# Altium PCB MB_PCB.PcbDoc
Units mm, origin at the board's own origin, x right, y up, seen from the top; angles counter-clockwise.
Board outline 70 x 47.5 mm, 2 copper layers (Top Layer, Bottom Layer); 28 components, 20 nets, 111 pads, 0 vias.
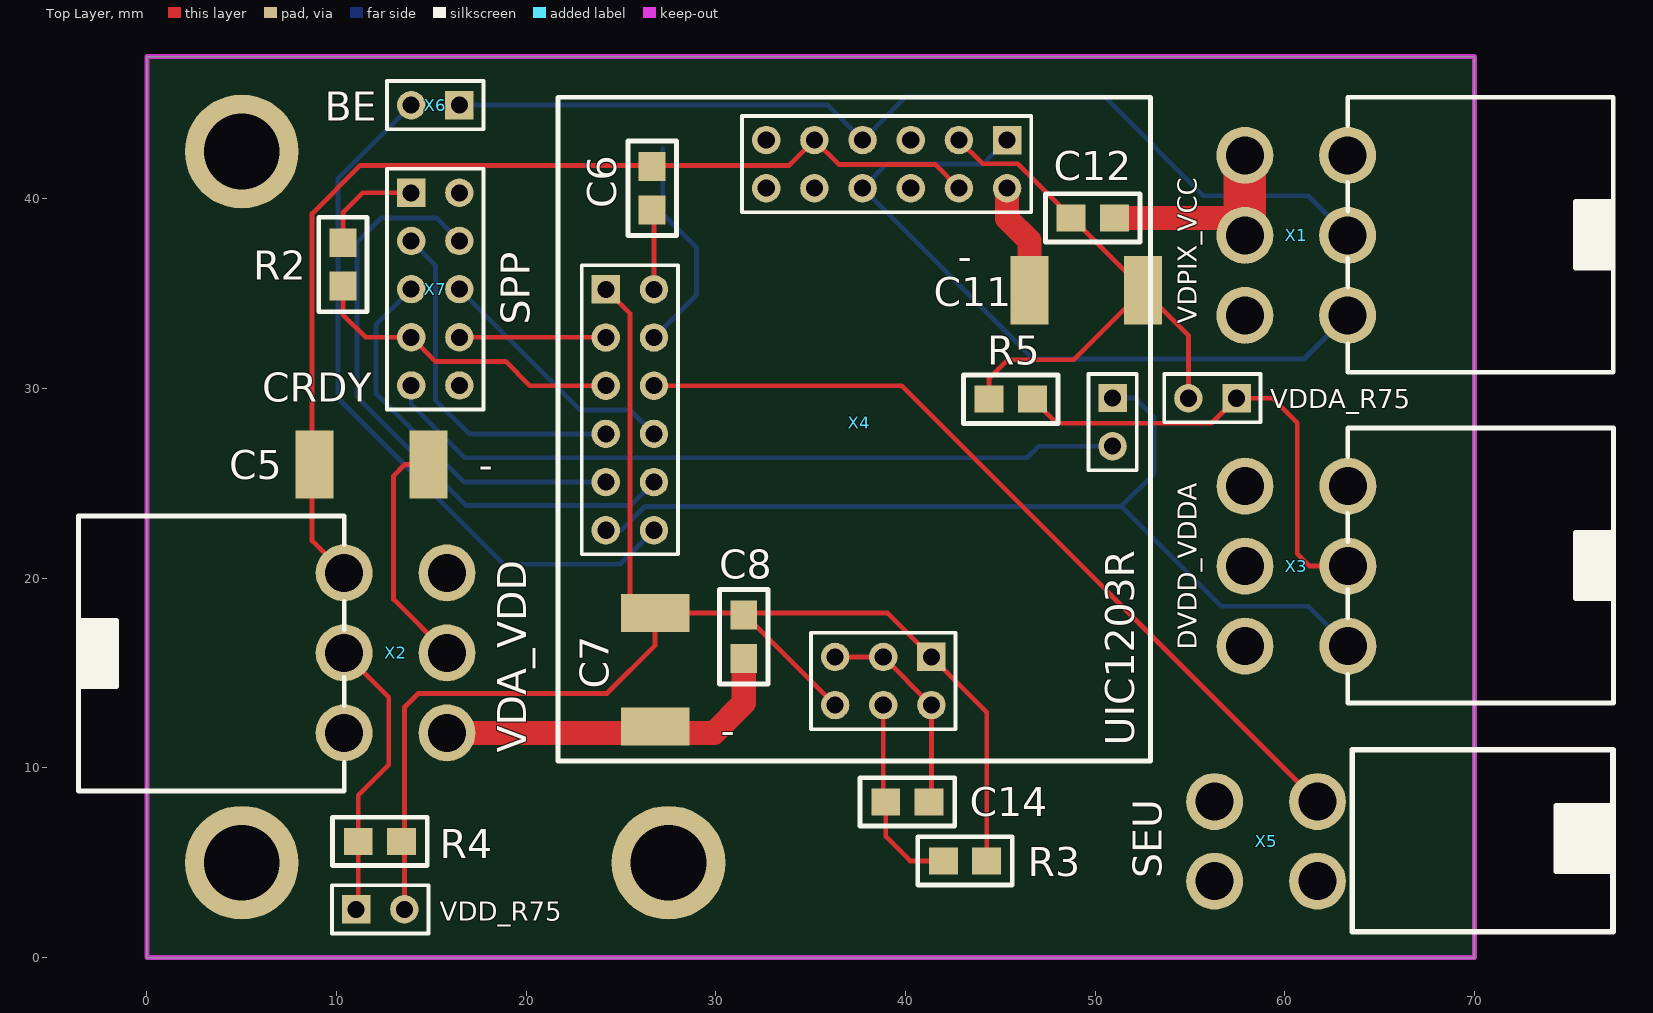
[diagram p0: Top Layer view]
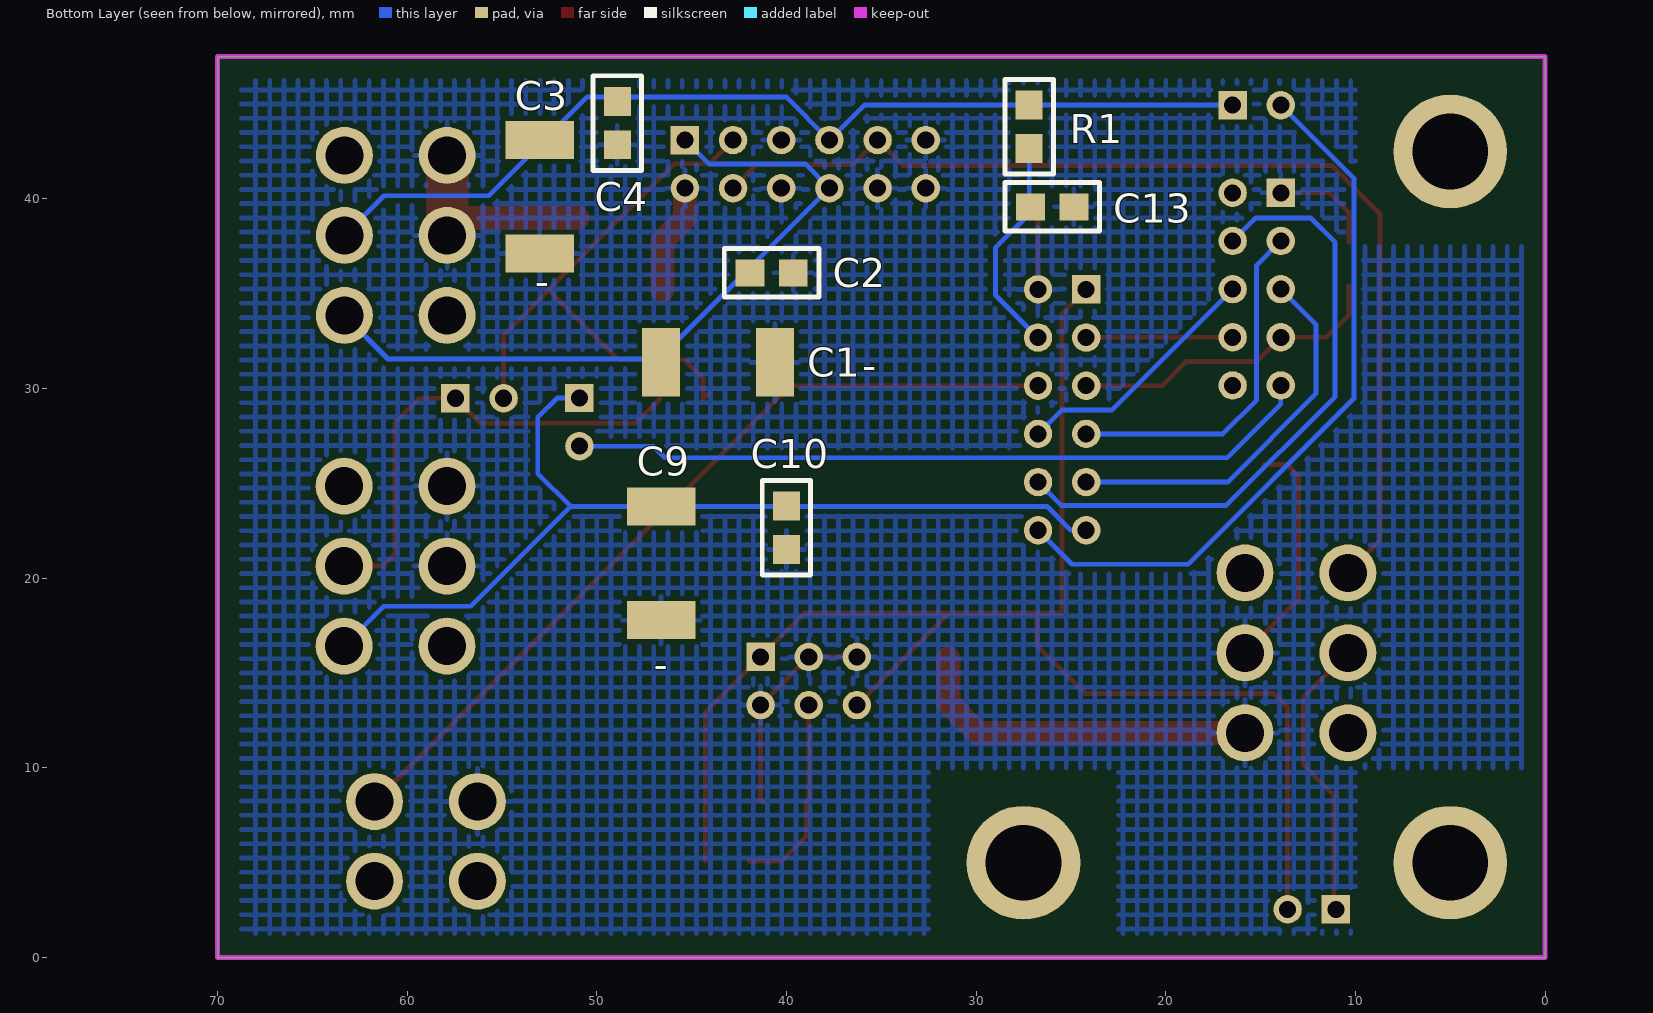
[diagram p1: Bottom Layer view, seen from below]

## Layer stack, top to bottom
Top Solder: solder mask 0.0102, Solder Resist, Dk 3.5
Top Layer: signal copper 0.0356
Dielectric 1: dielectric 0.32, FR-4, Dk 4.8
Bottom Layer: signal copper 0.0356
Bottom Solder: solder mask 0.0102, Solder Resist, Dk 3.5

## Board outline
0,0 70,0 70,47.5 0,47.5

## Design rules (kind name [scope] priority, off if disabled: settings)
Clearance [All] p1: gap=0.254
PolygonConnect [All] p1: connectstyle=Relief reliefconductorwidth=0.254 reliefentries=4 polygonreliefangle="90 Angle" airgapwidth=0.254
RoutingVias [All] p1: holewidth=0.711 width=1.27 viastyle="Through Hole" minholewidth=0.711 minwidth=1.27 maxholewidth=0.711 maxwidth=1.27
SolderMaskExpansion [All] p1: expansion=0.102
Width [All] p1: maxlimit=2.254 minlimit=0.254 preferedwidth=0.254
29 further rules are at their usual default settings.

## Components (designator, comment, footprint, x,y, rotation, side; value= is the part's Value field where it differs from the comment)
C1 "10,0" Cap_BIG 47.701,33.284 r270 bottom
C2 "0,1" CAP_SMALL 38.278,37.374 r0 bottom
C3 "10,0" Cap_BIG 51.105,44.206 r0 bottom
C4 "0,1" CAP_SMALL 47.65,41.489 r90 bottom
C5 "10,0" Cap_BIG 7.747,27.9 r270 top
C6 "0,1" CAP_SMALL 27.915,38.06 r90 top
C7 "10,0" Cap_BIG 28.702,19.264 r180 top
C8 "0,1" CAP_SMALL 32.741,14.412 r90 top
C9 "10,0" Cap_BIG 44.704,24.877 r0 bottom
C10 "0,1" CAP_SMALL 38.735,20.153 r90 bottom
C11 "10,0" Cap_BIG 53.619,33.284 r90 top
C12 "0,1" CAP_SMALL 52.375,40.269 r180 top
C13 "0,1" CAP_SMALL 28.499,38.314 r180 bottom
C14 "0,1" CAP_SMALL 37.592,6.934 r0 top
R1 "3 кОм" RES 25.959,46.289 r0 bottom
R2 "20 кОм" RES 11.582,39.025 r180 top
R3 "1 кОм" RES 45.618,3.852 r90 top
R4 "75" RES 9.804,7.366 r270 top
R5 "75" RES 48.031,28.194 r90 top
VDD_R75 "Header 2" HDR1X2 11.036,2.54 r0 top (schematic designator VDD_RES)
VDDA_R75 "Header 2" HDR1X2 57.455,29.489 r180 top (schematic designator VDDA_RES)
X1 "VDPIX_VCC" POWER 63.313,33.86 r270 top
X2 "VDA_VDD" POWER 10.401,20.28 r90 top
X3 "DVDD_VDDA" POWER 63.322,16.419 r270 top
X4 "UIC1203R" MEZ_UIC1203R 50.918,26.961 r90 top
X5 "SEU" AMP_VOLTMETER 56.299,4.024 r90 top
X6 "BE" HDR1X2 16.476,44.943 r180 top
X7 "SPP" HDR2X5 13.936,40.321 r270 top

## Footprints (in the part's own frame and the unit in brackets; to place one, negate y for a bottom-side part, rotate by r counter-clockwise, add the part's x,y. Pads: shape width x height; smd on the part's side, far side on the other; paste and mask are expansions set on the pad)
AMP_VOLTMETER [mm] "AMP_VOLTMETER"
  round 3 hole 2: 1(0,0) 2(0,-5.423) 3(4.2,-5.423) 4(4.2,0)
  silkscreen extent -2.66,-21 6.94,-7.25
Cap_BIG [mm] "FROM_MAX"
  rect 3.6x2 smd: 1(1.905,7.092) 2(1.905,1.092)
  body extent 0,-0.01 3.81,8.19, height 2.54
CAP_SMALL [mil] "FROM_MAX"
  rect 60x55.98 smd: 1(53.71,50) 2(143.71,50)
  silkscreen extent 1,0 197,100, body extent 20,18 178,82, height 100
HDR1X2 [mm] "Connector; Header; 2 Position"
  rect 1.5x1.5 hole 0.9: 1(0,0)
  round 1.5 hole 0.9: 2(2.54,0)
  silkscreen extent -1.27,-1.27 3.81,1.27
HDR2X5 [mm] "Connector; Header; 5x2 Position"
  rect 1.5x1.5 hole 0.9: 1(0,0)
  round 1.5 hole 0.9: 2(0,2.54) 3(2.54,0) 4(2.54,2.54) 5(5.08,0) 6(5.08,2.54) 7(7.62,0) 8(7.62,2.54) 9(10.16,0) 10(10.16,2.54)
  silkscreen extent -1.27,-1.27 11.43,3.81
MEZ_UIC1203R [mm]
  rect 1.5x1.5 hole 0.9: 1(16.143,5.563) 13(8.269,26.721) 25(-11.112,9.55) 31(2.54,0)
  round 1.5 hole 0.9: 2(13.603,5.563) 3(16.143,8.103) 4(13.603,8.103) 5(16.143,10.643) 6(13.603,10.643) 7(16.143,13.183) 8(13.603,13.183) 9(16.143,15.723) 10(13.603,15.723) 11(16.143,18.263) 12(13.603,18.263) 14(8.269,24.181) 15(5.729,26.721) 16(5.729,24.181) 17(3.189,26.721) 18(3.189,24.181) 19(0.649,26.721) 20(0.649,24.181) 21(-1.891,26.721) 22(-1.891,24.181) 23(-4.431,26.721) 24(-4.431,24.181) 26(-13.652,9.55) 27(-11.112,12.09) 28(-13.652,12.09) 29(-11.112,14.63) 30(-13.652,14.63) 32(0,0)
  silkscreen extent -16.6,-2.01 18.4,29.24
POWER [mm] "POWER"
  round 3 hole 2: 1(0,0) 2(-4.217,0) 3(-8.435,0) 4(0,-5.422) 5(-4.217,-5.422) 6(-8.435,-5.422)
  silkscreen extent -11.5,0 3,14
RES [mil] "FROM_MAX"
  rect 55.98x60 smd: 1(49,52.71) 2(49,142.71)
  silkscreen extent -1,0 99,196, body extent 17,19 81,177, height 100

## Part data
C1 C3 C5 C7 C9 C11: library part CAP_BIG
C2 C4 C6 C8 C10 C12 C13 C14: library part CAP_SMALL
R1 R2 R3 R4 R5: library part RES
VDD_R75 VDDA_R75: "Header, 2-Pin"
X1 X2 X3: library part POWER
X4: library part MEZ_UIC1203R
X5: library part AMP_VOLTMETER
X6: library part "Header 2", "Header, 2-Pin"
X7: library part "Header 5X2", "Header, 5-Pin, Dual row"

## Free pads (board coordinates)
  round 6 hole 4 unplated: 0(5,5) 0(5,42.5) 0(27.5,5)

## Nets (pads, with @x,y where several pads share a name; then routed paths per layer and width w, separated by ;. In a path a pad name is that pad's centre, name@x,y a point inside that pad or via, vN(x,y) a via of type N, cw(c..) or ccw(c..) an arc to the next point about the centre after c; other vN are vias at no path point)
BE: X4.24 X6.2 | length 38.1
  Bottom Layer w0.254: X6.2 10.084,41.091 10.084,29.474 18.821,20.737 24.944,20.737 X4.24
CRDY: X4.32 X7.9 | length 39.4
  Bottom Layer w0.254: X7.9 13.936,29.179 16.764,26.35 46.406,26.35 47.017,26.961 X4.32
DVDD: C9.2 C10.2 X3.1 X4.23 X4.31 | length 50.7
  Bottom Layer w0.254: X4.23 25.008,22.53 26.264,23.785 C9.2 51.384,23.785 ; X4.31 52.094,29.501 53.111,28.484 53.111,25.512 51.384,23.785 ; X3.1 61.224,18.517 56.652,18.517 51.384,23.785
ERUN: R2.2 X4.17 X7.7 | length 16.9
  Top Layer w0.254: R2.2 10.338,33.894 11.53,32.701 X7.7 15.206,31.431 18.914,31.431 20.196,30.15 X4.17
GND: C1.1 C2.1 C3.1 C4.1 C5.1 C6.1 C7.1 C8.1 C9.1 C10.1 C11.1 C12.1 C13.2 C14.2 R2.1 X1.5 X1.6 X2.5 X2.6 X3.5 X3.6 X4.2 X4.5 X4.6 X4.10 X4.11 X4.12 X4.14 X4.26 X4.27 X4.29 X5.4 X7.1 | length 69.8
  Top Layer w0.254: R2.1 10.338,39.279 11.38,40.321 X7.1 ; C5.1 13.599,25.995 13.005,25.4 13.005,18.881 X2.5 ; X4.14 26.737,39.135 C6.1@27.026,39.424 ; X4.29 X4.27 X4.26 41.368,8.33 C14.2
  Top Layer w1.27: X2.6 29.894,11.845 31.471,13.422 C8.1 ; X4.2 45.355,38.973 46.527,37.801 C11.1 ; C12.1 56.969,38.999 X1.5
  Top Layer w2.254: X1.5 X1.6
MISO: X4.21 X7.5 | length 20.3
  Bottom Layer w0.254: X7.5 12.081,33.387 12.081,29.73 16.741,25.07 X4.21
MOSI: X4.22 X7.4 | length 33.1
  Bottom Layer w0.254: X7.4 15.258,38.999 12.37,38.999 11.074,37.704 11.074,29.576 16.815,23.836 25.503,23.836 X4.22
NetR4_1: R4.1 VDD_R75.1 X2.2 | length 15.2
  Top Layer w0.254: X2.2 12.751,13.713 12.751,10.16 11.143,8.552 R4.1 11.143,2.647 VDD_R75.1
NetR5_1: R5.1 VDDA_R75.1 X3.2 | length 25.4
  Top Layer w0.254: R5.1 47.963,28.169 56.134,28.169 VDDA_R75.1 59.36,29.489 60.655,28.194 60.655,21.285 61.304,20.636 X3.2
NRST: C13.1 R1.2 X4.16 | length 11.6
  Bottom Layer w0.254: X4.16 28.981,34.934 28.981,37.425 27.203,39.203 R1.2
SCLK: X4.19 X7.3 | length 18.6
  Bottom Layer w0.254: X7.3 15.215,36.502 15.215,29.39 16.995,27.61 X4.19
SCS: X4.20 X7.6 | length 13.4
  Bottom Layer w0.254: X7.6 22.852,28.865 25.482,28.865 X4.20
SEU: X4.18 X5.3 | length 44.1
  Top Layer w0.254: X4.18 39.796,30.15 X5.3
VCC: C3.2 C4.2 R1.1 X1.2 X4.7 X6.1 | length 51.6
  Bottom Layer w0.254: X6.1 35.896,44.943 X4.7 40.007,45.375 50.495,45.375 55.702,40.168 61.223,40.168 X1.2
VDA: C5.2 C6.2 X2.1 X4.4 X4.9 | length 56.4
  Top Layer w0.254: X2.1 8.712,21.969 8.712,39.228 11.252,41.768 33.86,41.768 X4.9 36.48,41.819 41.56,41.819 X4.4
VDD: C7.2 C8.2 R3.1 R4.2 VDD_R75.2 X4.13 X4.25 X4.30 | length 80.2
  Top Layer w0.254: VDD_R75.2@13.589,2.54 13.589,13.208 14.3,13.919 24.257,13.919 26.797,16.459 C7.2 ; X4.13 25.476,33.951 25.476,18.171 C7.2 ; X4.30 C8.2@31.426,18.171 ; R3.1 44.28,12.937 X4.25 39.046,18.171 C8.2@31.426,18.171 ; C7.2 C8.2@31.426,18.171
VDDA: C11.2 C12.2 R5.2 VDDA_R75.2 X4.3 | length 31.3
  Top Layer w0.254: X4.3 44.069,41.85 45.917,41.85 C11.2@52.553,35.215 ; R5.2@44.069,29.776 R5.2 44.407,30.538 45.39,31.521 48.859,31.521 C11.2 54.915,32.802 VDDA_R75.2
VDPIX: C1.2 C2.2 X1.1 X4.1 X4.8 | length 38.9
  Bottom Layer w0.254: X4.1 44.096,41.844 39.016,41.844 X4.8 46.742,31.557 61.01,31.557 X1.1
VE: C14.1 R3.2 X4.28 | length 10.6
  Top Layer w0.254: X4.28@38.837,13.3 X4.28 38.828,8.333 C14.1 38.956,6.383 40.242,5.097 R3.2
XI: X4.15 X7.8 | length 7.7
  Top Layer w0.254: X7.8 24.185,32.701 X4.15
pads on no net: X1.3 X1.4 X2.3 X2.4 X3.3 X3.4 X5.1 X5.2 X7.2 X7.10

## Polygon pours and split planes (outlines as drawn)
GND on Bottom Layer "Top Layer-No Net" (hatched 90Degree grid 0.75 track 0.254, remove dead copper, pour order 8): 1.25,1.25 1.25,46.25 68.75,46.25 68.75,1.25

## Keep-outs
Keep-Out Layer:
  the board outline again, w0.254

## Other copper
Bottom Layer:
  pour cut-out: 14,39 14,35 17.5,35 17.5,38
  pour cut-out: 22.5,10 22.5,0.5 32.5,0.5 32.5,9.876 32.376,10
  pour cut-out: 10,37.5 0.5,37.5 0.5,47 10,47
  pour cut-out: 0.75,0.75 0.75,10 10,10 10,0.75
  pour cut-out: 27.5,26.35 27.5,23.785 51.384,23.785 53.111,25.512 53.111,28.484 52.094,29.501 52.093,29.5 50,29.5 50,26.961 47.017,26.961 46.406,26.35
  pour cut-out: 10.084,38 11.25,38 11.25,29.4 11.176,29.474 10.084,29.474

## Silkscreen, mask and mechanical layers (free items; w line width, h text height)
Top Overlay:
  text "-" at 42.75,36.233 h1.52
  text "CRDY" at 6.071,29.297 h1.52
  text "-" at 17.5,25.233 h1.52
  text "-" at 30.25,11.233 h1.52
Bottom Overlay:
  text "-" at 52.5,36.017 h1.52 r180
  text "-" at 36,30.483 h1.52
  text "-" at 47,14.733 h1.52